# EAGLE board MouseGoggles Hat-1-5 (EAGLE 9.6.2)
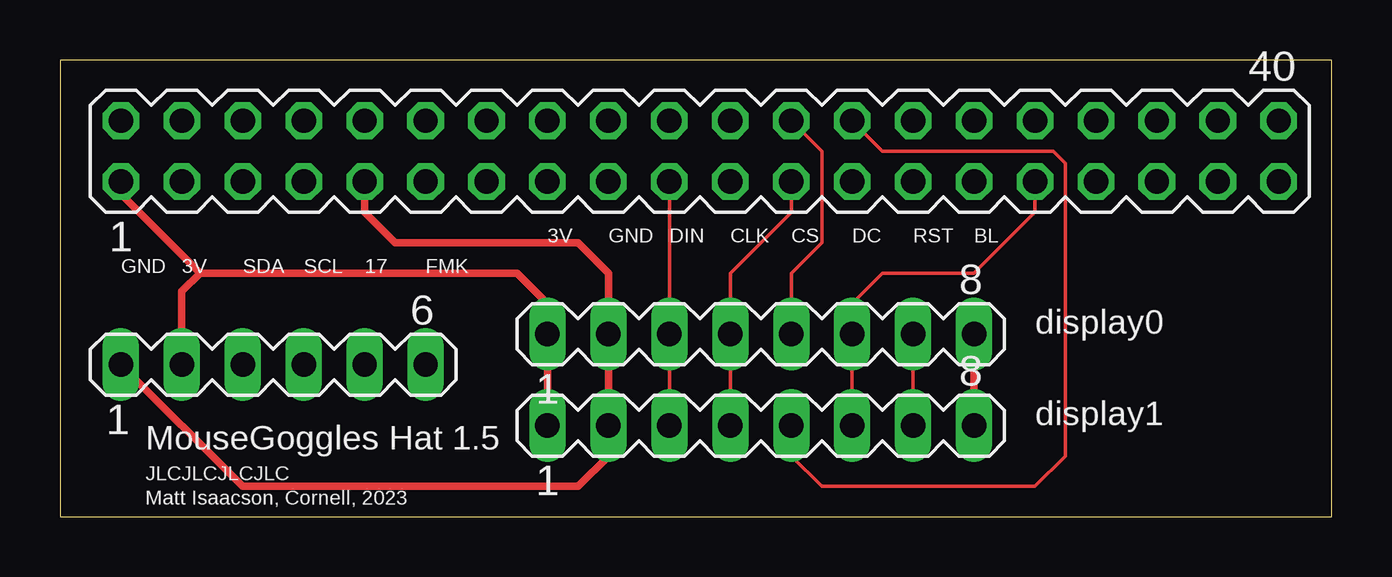
[diagram p0: board, top side]
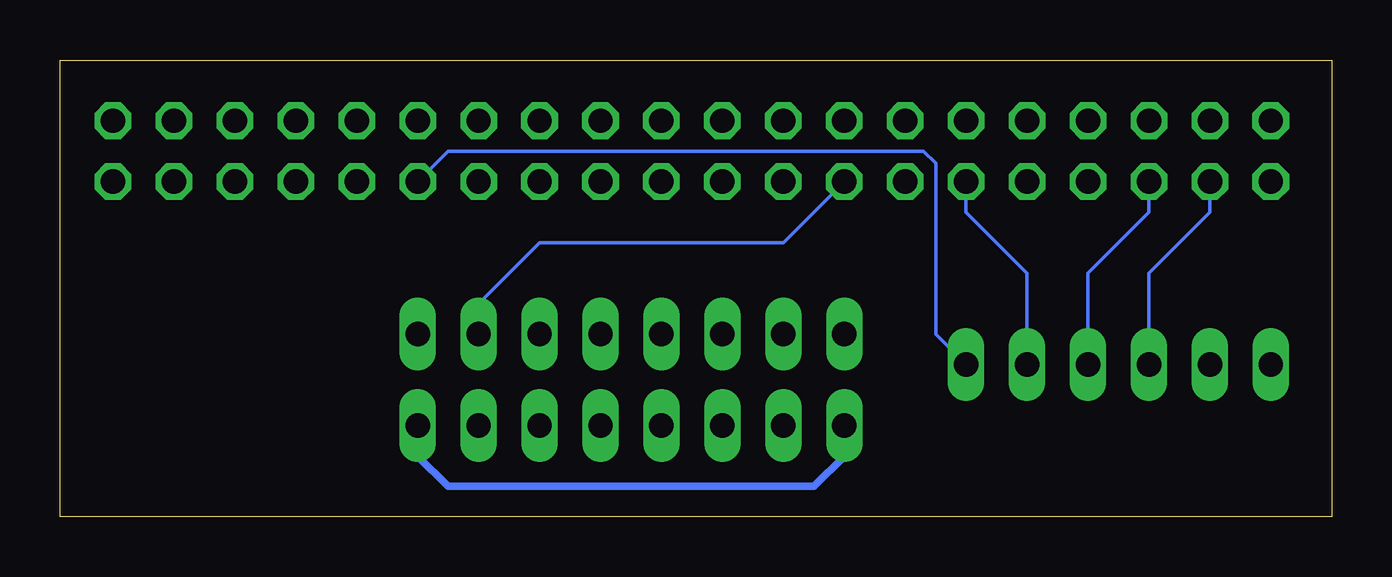
[diagram p1: board, bottom side, seen from below]

Size 53.01 x 19.04 mm. Coordinates in mm from the lower left corner, seen from the top.
Outline: 0,0 53.01,0 53.01,19.04 0,19.04 0,0
Copper layers (1*16): Top 0.035mm / dielectric 1.5mm / Bottom 0.035mm
Design rules "default": minimum track width 6mil, minimum drill 0.35mm, track to track 6mil, track to pad 6mil, pad to pad 6mil, via to via 6mil, smd to smd 6mil, copper to edge 40mil, drill to drill 6mil, minimum pad ring 10mil, minimum via ring 8mil, stop-mask expansion 4mil, vias tented up to drill 0mil, thermal gap 10mil

## Footprints (pad centres in the part's own frame; a part is rotated, then mirrored left to right if it is on the bottom)
MA20-2 = drill 1.016 octagon: 1 -24.13,-1.27; 2 -24.13,1.27; 3 -21.59,-1.27; 4 -21.59,1.27; 5 -19.05,-1.27; 6 -19.05,1.27; 7 -16.51,-1.27; 8 -16.51,1.27; 9 -13.97,-1.27; 10 -13.97,1.27; 11 -11.43,-1.27; 12 -11.43,1.27; 13 -8.89,-1.27; 14 -8.89,1.27; 15 -6.35,-1.27; 16 -6.35,1.27; 17 -3.81,-1.27; 18 -3.81,1.27; 19 -1.27,-1.27; 20 -1.27,1.27; 21 1.27,-1.27; 22 1.27,1.27; 23 3.81,-1.27; 24 3.81,1.27; 25 6.35,-1.27; 26 6.35,1.27; 27 8.89,-1.27; 28 8.89,1.27; 29 11.43,-1.27; 30 11.43,1.27; 31 13.97,-1.27; 32 13.97,1.27; 33 16.51,-1.27; 34 16.51,1.27; 35 19.05,-1.27; 36 19.05,1.27; 37 21.59,-1.27; 38 21.59,1.27; 39 24.13,-1.27; 40 24.13,1.27
MA08-1 = drill 1.016 long: 1 -8.89,0; 2 -6.35,0; 3 -3.81,0; 4 -1.27,0; 5 1.27,0; 6 3.81,0; 7 6.35,0; 8 8.89,0
MA06-1 = drill 1.016 long: 1 -6.35,0; 2 -3.81,0; 3 -1.27,0; 4 1.27,0; 5 3.81,0; 6 6.35,0

## Placement (x,y rotation side)
SV1  [MA20-2]  26.67,15.24 0 top
SV2  [MA08-1]  29.21,7.62 0 top
SV3  [MA08-1]  29.21,3.81 0 top
SV4  [MA06-1]  8.89,6.35 0 top

## Library data of the parts
SV1-SV4 = con-lstb; OC_FARNELL: unknown; OC_NEWARK: unknown

## Nets
N$1: SV1.1 SV2.1 SV2.8 SV3.1 SV3.8 SV4.2
N$2: SV1.9 SV2.2 SV3.2 SV4.1
N$3: SV1.19 SV2.3 SV3.3
N$4: SV1.23 SV2.4 SV3.4
N$5: SV1.24 SV2.5
N$6: SV1.26 SV3.5
N$7: SV1.31 SV2.6 SV3.6
N$8: SV1.15 SV2.7 SV3.7
N$9: SV1.3 SV4.3
N$10: SV1.5 SV4.4
N$11: SV1.11 SV4.5
N$12: SV1.29 SV4.6

## Tracks (layer width: path | path; a pad name or v marks a point on that pad's centre or on a via)
N$1
  Top 0.305: SV1.1 2.54,13.46 5.84,10.16 | SV4.2 5.08,9.4 5.84,10.16 | 5.84,10.16 19.05,10.16 20.32,8.89 SV2.1 SV3.1 | SV2.8 SV3.8
  Bottom 0.305: SV3.1 20.32,2.54 21.59,1.27 36.83,1.27 38.1,2.54 SV3.8
N$2
  Top 0.152: SV3.2 22.86,2.54
  Top 0.305: SV1.9 12.7,12.7 13.97,11.43 21.59,11.43 22.86,10.16 SV2.2 SV3.2 | 22.86,2.54 21.59,1.27 7.62,1.27 SV4.1
N$3
  Top 0.152: SV1.19 SV2.3 SV3.3
N$4
  Top 0.152: SV1.23 30.48,12.7 27.94,10.16 SV2.4 SV3.4
N$5
  Top 0.152: SV1.24 31.75,15.24 31.75,11.43 30.48,10.16 SV2.5
N$6
  Top 0.152: SV1.26 34.29,15.24 41.4,15.24 41.91,14.73 41.91,2.54 40.64,1.27 31.75,1.27 30.48,2.54 SV3.5
N$7
  Top 0.152: SV1.31 40.64,12.7 38.1,10.16 34.29,10.16 33.02,8.89 SV2.6 SV3.6
N$8
  Top 0.152: SV2.7 SV3.7
  Bottom 0.152: SV1.15 22.86,11.43 33.02,11.43 35.56,8.89 SV2.7
N$9
  Bottom 0.152: SV1.3 5.08,12.7 7.62,10.16 SV4.3
N$10
  Bottom 0.152: SV1.5 7.62,12.7 10.16,10.16 SV4.4
N$11
  Bottom 0.152: SV1.11 15.24,12.7 12.7,10.16 SV4.5
N$12
  Bottom 0.152: SV1.29 36.83,15.24 17.02,15.24 16.51,14.73 16.51,7.62 SV4.6

## Text on the board
tNames: 3V | GND | DIN | CLK | CS | DC | RST | BL | GND | 3V | SDA | SCL | 17 | FMK | display0 | display1 | MouseGoggles Hat 1.5 | JLCJLCJLCJLC | Matt Isaacson, Cornell, 2023